# Altium PCB pix v2.4.8.PcbDoc (part 2 of 3)
Units mil, origin at the board's own origin, x right, y up, seen from the top; angles counter-clockwise.
Board outline 2756 x 1595 mil, 4 copper layers (Top, MidLayer1, MidLayer2, Bottom), stack 50.397 mil thick; 154 components, 289 nets, 731 pads, 438 vias.
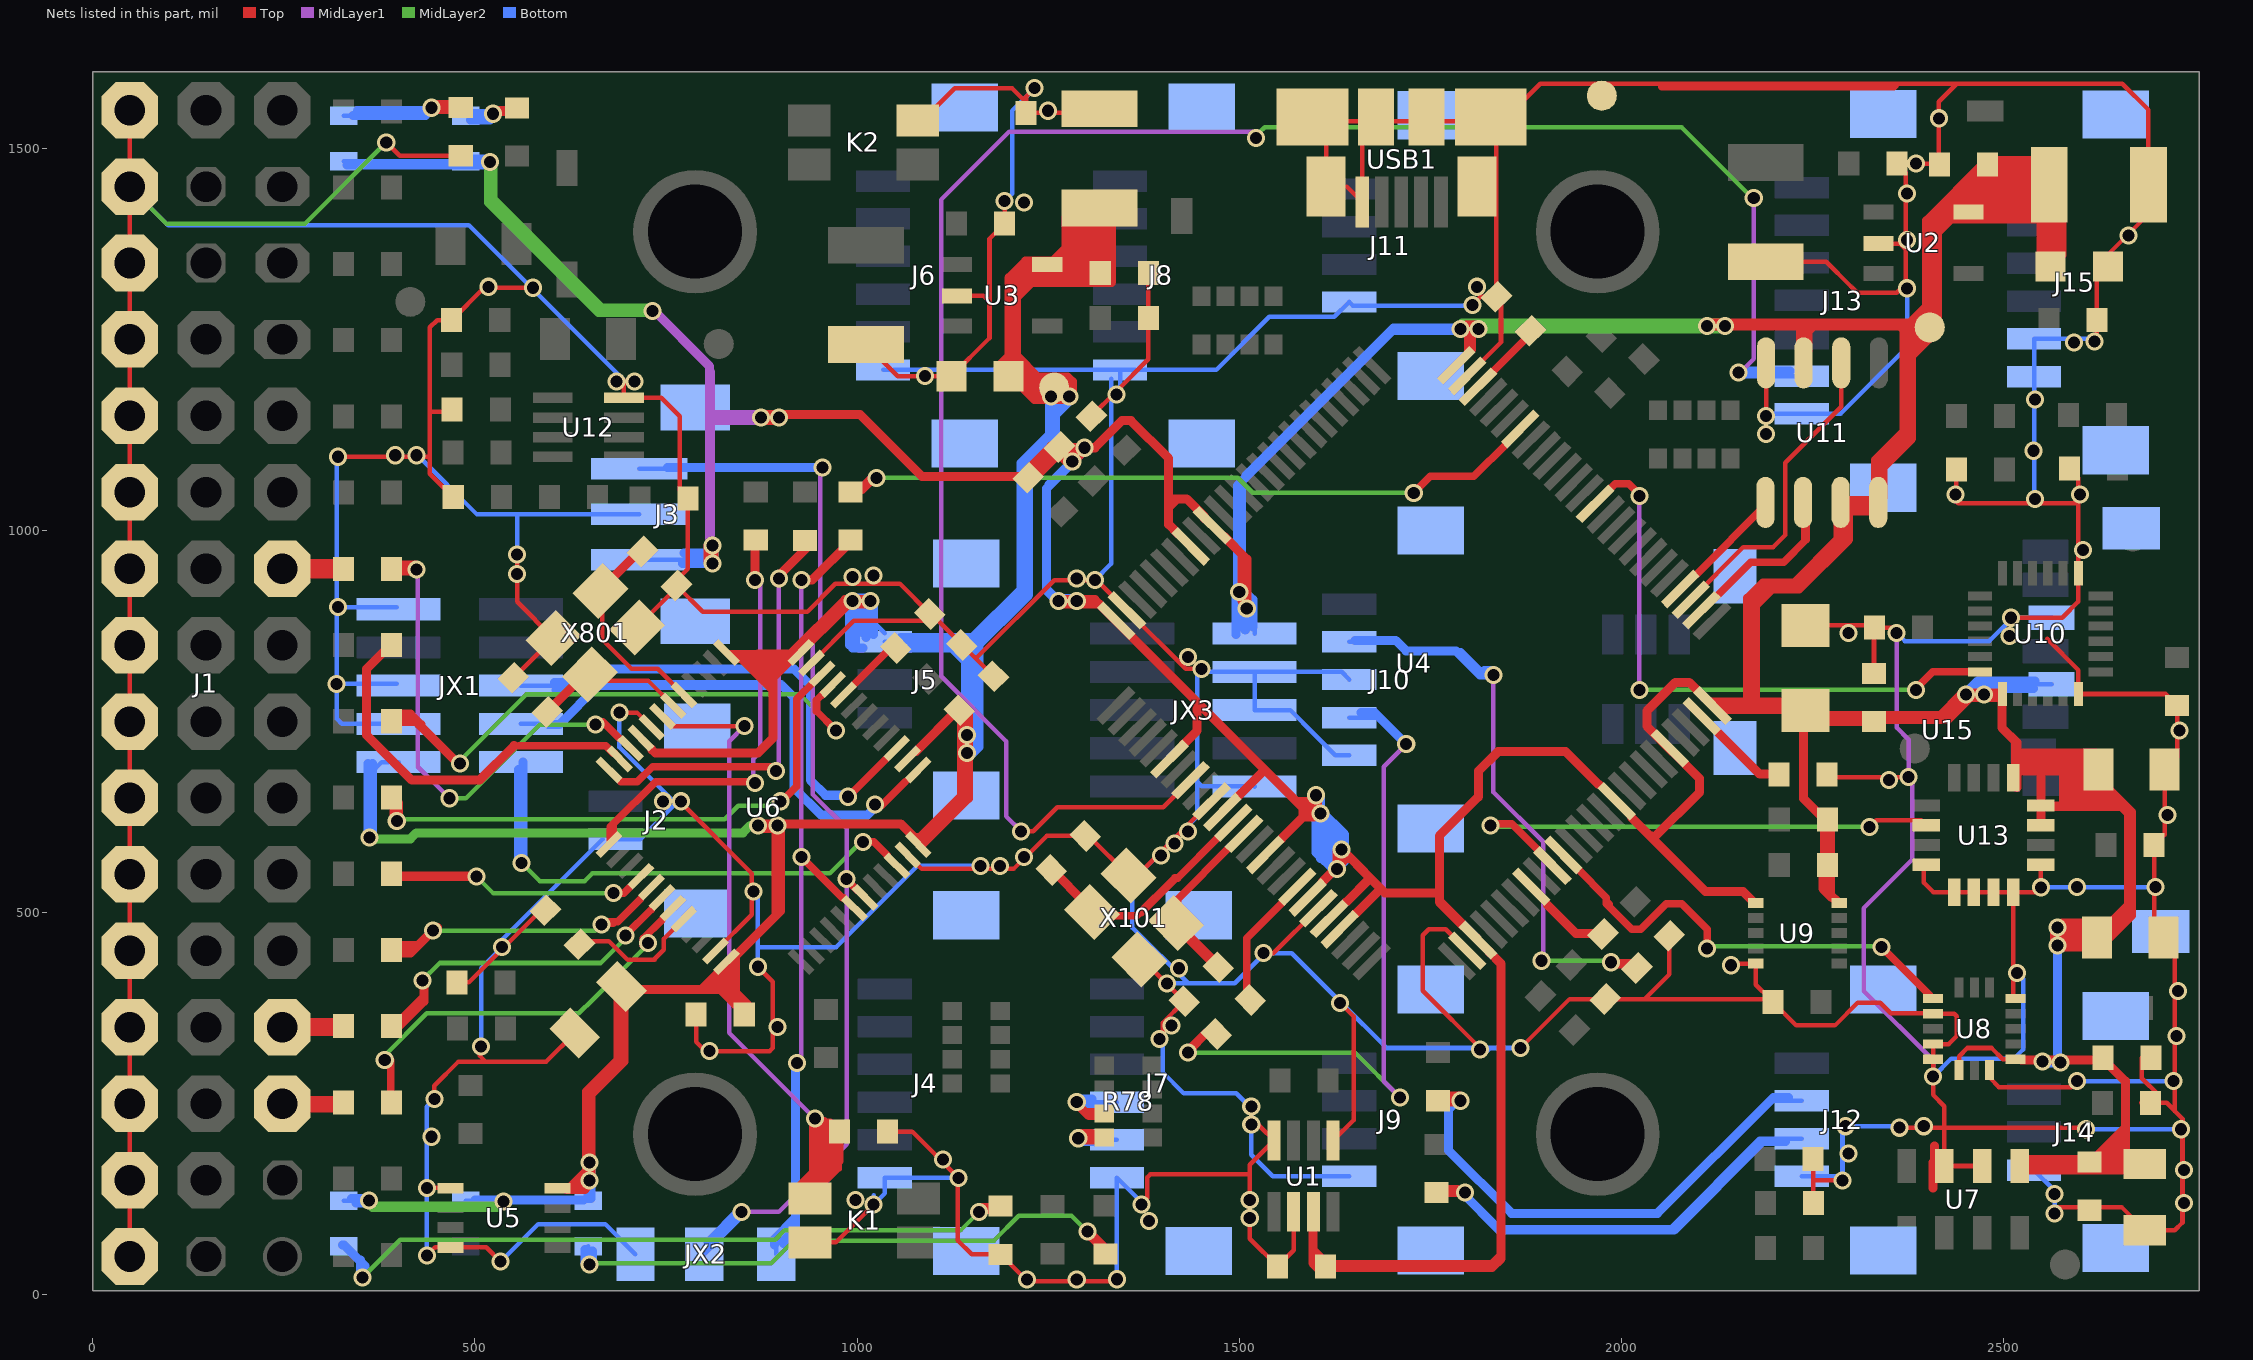
[diagram p4: the nets of this part, all layers, seen from the top]

## Via types
v1: diameter 23.62, hole 15.75, Top to Bottom, 438 vias

## Nets (pads, with @x,y where several pads share a name; then routed paths per layer and width w, separated by ;. In a path a pad name is that pad's centre, name@x,y a point inside that pad or via, vN(x,y) a via of type N, cw(c..) or ccw(c..) an arc to the next point about the centre after c; other vN are vias at no path point) (continued)
FMU-VDD_3V3: C3.2 C4.2 C18.1 C19.2 C20.1 C32.2 C33.2 C38.2 C45.1 C46.1 D1.2 J3.P$1 JX3.1 LED2.A LED4.A pad.0@2403.54,1265.75 R21.2 R22.2 R25.2 R26.2 U1.3 U2.5 U4.6 U4.11 U4.15 U4.19 U4.21 U4.22 U4.28 U4.41 U4.46 U4.50 U4.75 U4.91 U4.93 U4.100 U7.1 U8.1 U8.14 U9.1 U9.10 U10.13 U11.3 U11.7 U11.8 U13.1 U13.15 U13.16 U15.4 | length 26052.6
  Top w5.91: v1(874.02,1147.64) 875,1148.62 1002.95,1148.62 1082.7,1068.88 R25.2@1224.12,1068.88 1224.46,1068.88 R26.2@1264.88,1109.3 1297.24,1109.3 1310.09,1109.3 1344.49,1143.7 1358.27,1143.7 1407.48,1094.49 1407.48,1025.59 ; v1@1271.65,909.45 1311.42,909.45 U4.100@1339.16,881.71 1442.91,777.95 ; U4.6@1408.64,700.87 1442.91,735.14 1442.91,777.95 ; U4.93@1436.6,979.14 1407.48,1008.26 1407.48,1025.59 ; U4.11@1477.94,631.57 1531.6,685.24 1535.63,685.24 ; v1@1507.87,897.64 1507.87,960.63 1464.44,1004.07 U4.91@1464.44,1006.98 1430.08,1041.34 1423.23,1041.34 1407.48,1025.59 ; U4.15@1534.06,575.45 1580.71,622.1 ; U4.19@1589.74,519.77 1633.86,563.89 v1@1633.86,578.8 ; U1.3@1597,108.65 1597,53.16 C33.2@1613.11,37.05 1824.45,37.05 1842.52,55.12 1842.52,434.03 U4.28@1812.45,464.09 ; v1(1606.3,629.92) 1598.48,622.1 1580.71,622.1 ; U4.21@1617.58,491.93 1668.34,542.69 1668.34,544.32 ; U4.22@1631.5,478.01 1680.09,526.6 1686.06,526.6 ; v1(1633.86,582.68) v1@1633.86,578.8 ; U4.75@1784.09,1216.32 1801.18,1233.42 1801.18,1267.72 ; U4.28@1811.5,464.09 U4.28@1812.45,464.09 ; 2043.32,598.44 2102.36,657.48 2102.36,676.02 U4.46@2063.37,715.01 2035.43,742.95 2035.43,763.78 2072.83,801.18 2088.92,801.18 U4.50@2119.23,770.87 2169.29,770.87 ; v1@2122.05,1273.62 2125.98,1269.68 2257.87,1269.68 ; U9.1@2175.89,512.59 2162.89,525.59 2114.2,525.59 2079.74,560.05 U4.41@1994.07,645.72 1930.14,709.65 1837.6,709.65 1812.99,685.04 1812.99,651.57 1761.81,600.39 1761.81,519.69 ; C46.1@2238.19,761.83 2238.19,652.95 R21.2@2269.57,621.57 R22.2@2269.57,562.52 2269.57,528.05 U9.10@2285.02,512.59 ; U11.3@2238.52,1219.34 2238.52,1250.33 2257.87,1269.68 ; U8.14@2441.93,294.03 2441.93,312.01 2452.76,322.83 2484.35,322.83 2499.15,308.03 U8.1@2515.87,308.03 v1@2574.8,308.03 ; C4.2@2479.29,1478.94 2479.29,1452.56 ; U7.1@2521.09,168.43 C3.2@2607.36,168.43 ; U13.15@2548.9,614.41 U13.16@2548.9,640 2548.9,687.17 2549.21,687.48 ; U13.16@2553.07,635.83 2655.51,635.83 2665.35,625.98 2665.35,510.16 C38.2@2622.64,467.44 2581.61,467.44 v1(2570.87,456.69) ; C45.1@2559.72,1452.56 2479.29,1452.56 ; D1.2@2561.77,1345.43 C45.1@2561.77,1450.51 ; v1@2570.87,304.1 v1@2574.8,308.03 ; 2616.26,308.03 v1@2574.8,308.03 ; C19.2@2624.13,687.48 2549.21,687.48 ; C20.1@2630.08,310.04 2659.45,280.67 2659.45,220.51 C3.2@2612.44,173.5 2614.96,170.98 C18.1@2684.8,170.98 ; 1442.91,777.95 1535.63,685.24 ; 1535.63,685.24 1580.71,640.16 1580.71,622.1 ; v1@1633.86,578.8 1668.34,544.32 ; 1668.34,544.32 1686.06,526.6 ; 1686.06,526.6 1754.89,526.6 1761.81,519.69 ; 1761.81,519.69 1812.45,469.05 U4.28@1812.45,464.09 ; 2169.29,770.87 2234.66,770.87 C46.1@2240.95,764.59 2255.53,750.01 C32.2@2330.59,750.01 2429.14,750.01 2458.66,779.53 2465.17,786.04 U10.13@2498.8,786.04 2498.8,739.39 2512.9,725.29 U13.1@2512.9,676.42 2523.96,687.48 2549.21,687.48 ; 2169.29,770.87 2169.29,907.48 2187.01,925.2 2222.44,925.2 2286.94,989.7 U11.7@2286.94,1036.67 U11.8@2336.16,1036.67 2336.16,1086.16 2374.02,1124.02 2374.02,1253.94 2358.27,1269.68 ; 2257.87,1269.68 2358.27,1269.68 ; 2358.27,1269.68 2399.61,1269.68 2403.54,1273.62 2403.54,1403.54 2416.73,1416.73 U2.5@2454.37,1416.73 2479.29,1441.65 2479.29,1452.56
  Top w9.84: v1@1785.43,1261.81 v1@1814.96,1261.81 ; v1@1791.34,1261.81 v1@1818.9,1261.81 ; v1@1797.24,1269.68 v1@1811.02,1269.68 ; U4.75@1799.21,1234.25 v1@1799.21,1259.84 ; U4.75@1805.12,1236.22 1805.12,1257.87 1805.12,1242.13
  Top w11.81: v1@805.12,958.66 v1@805.12,980.32 ; v1@812.99,954.72 v1@812.99,984.25 ; v1@875.98,1143.7 901.57,1143.7 v1@899.61,1145.67 ; v1@877.95,1151.57 1003.94,1151.57 1084.65,1070.87 R25.2@1218.5,1070.87 ; R25.2@1220.47,1068.9 1220.47,1076.77 R26.2@1253.94,1110.24 ; R25.2@1232.28,1068.9 1267.72,1104.33 R26.2@1269.68,1104.33 ; R26.2@1261.81,1102.36 v1@1277.56,1086.61 ; v1@1265.75,909.45 1311.02,909.45 1584.65,635.83 1584.65,627.95 ; v1@1267.72,903.54 1316.93,903.54 U4.100@1324.8,895.67 ; R26.2@1267.72,1106.3 1283.46,1106.3 ; R26.2@1269.68,1108.27 1311.02,1108.27 1346.46,1143.7 1358.27,1143.7 1407.48,1094.49 1407.48,1007.87 U4.93@1419.29,996.06 ; v1@1281.5,1088.58 1301.18,1108.27 v1@1303.15,1108.27 ; 1409.45,1041.34 1431.1,1041.34 1454.72,1017.72 U4.91@1454.72,1015.75 ; U4.6@1427.17,720.47 1444.88,738.19 1444.88,773.62 ; U4.91@1480.32,992.13 1509.84,962.6 v1@1509.84,895.67 ; U4.11@1498.03,651.57 1531.5,685.04 1531.5,687.01 ; 1503.6,968.84 1503.6,907.82 v1@1509.84,901.57 ; U4.15@1555.12,596.46 1588.58,629.92 v1@1610.24,629.92 ; 1578.74,645.67 v1@1598.43,645.67 ; 1588.58,637.8 1590.55,637.8 ; U1.3@1596.46,88.58 1596.46,59.06 C33.2@1610.24,45.28 ; U1.3@1596.46,92.52 1596.46,41.34 C33.2@1606.3,31.5 ; v1@1596.46,629.92 v1@1596.46,653.54 ; v1@1602.36,635.83 v1@1602.36,657.48 ; U4.19@1608.27,539.37 1639.76,570.87 1643.7,570.87 ; C33.2@1612.2,35.43 1830.71,35.43 1842.52,47.24 1842.52,55.12 ; C33.2@1622.05,39.37 1830.71,39.37 1842.52,51.18 1842.52,433.07 1827.51,448.08 U4.28@1827.51,449.04 ; v1@1627.95,559.06 v1@1627.95,580.71 ; v1@1631.89,559.06 v1@1631.89,584.65 ; v1@1637.8,578.74 1690.94,525.59 1759.84,525.59 ; 1639.76,513.78 1671.26,545.28 ; U4.22@1651.57,498.03 1683.07,529.53 1687.01,529.53 ; U4.28@1793.31,482.28 1761.81,513.78 1761.81,600.39 1812.99,651.57 1812.99,685.04 1838.58,710.63 1862.2,710.63 ; 1842.52,710.63 1927.17,710.63 1970.47,667.32 ; U4.41@2013.78,624.02 2041.34,596.46 2043.31,598.43 2102.36,657.48 2102.36,675.2 2033.46,744.09 2033.46,763.78 2070.87,801.18 2088.58,801.18 U4.50@2108.27,781.5 ; 2039.37,600.39 2039.37,598.43 2110.24,527.56 2159.45,527.56 U9.1@2173.23,513.78 ; v1@2110.24,1267.72 pad.0@2395.67,1267.72 ; v1@2114.17,1271.65 2403.54,1271.65 2407.48,1267.72 pad.0@2407.48,1275.59 ; U4.50@2118.11,775.59 C46.1@2220.47,775.59 ; U4.50@2127.95,765.75 C46.1@2226.38,765.75 ; 2165.35,771.65 2165.35,911.42 2185.04,931.1 2226.38,931.1 2283.46,988.19 U11.7@2283.46,1019.68 ; 2167.32,771.65 2167.32,905.51 2188.98,927.17 2226.38,927.17 2293.31,994.09 U11.7@2293.31,1021.65 ; 2175.2,781.5 2175.2,901.57 2196.85,923.23 2232.28,923.23 2297.24,988.19 U11.7@2297.24,1027.56 ; U11.3@2234.25,1236.22 2234.25,1263.78 ; C46.1@2238.19,748.03 2238.19,649.61 2263.78,624.02 R21.2@2263.78,622.05 ; U11.3@2244.09,1236.22 2244.09,1265.75 ; C46.1@2259.84,750 C32.2@2336.61,750 ; C46.1@2259.84,755.91 2415.35,755.91 2446.85,787.4 U10.13@2494.09,787.4 ; R22.2@2263.78,559.06 2263.78,531.5 2275.59,519.68 ; R22.2@2265.75,564.96 R21.2@2265.75,620.08 ; C46.1@2269.68,757.87 2429.13,757.87 2452.76,781.5 U10.13@2496.06,781.5 ; R21.2@2273.62,622.05 2273.62,523.62 U9.10@2283.46,513.78 ; U11.7@2289.37,1025.59 U11.8@2338.58,1025.59 ; U11.7@2289.37,1033.46 U11.8@2332.68,1033.46 ; U11.7@2293.31,1039.37 U11.8@2334.65,1039.37 ; U11.8@2332.68,1035.43 2332.68,1092.52 2370.08,1129.92 2370.08,1263.78 ; U11.8@2342.52,1043.31 2342.52,1082.68 2379.92,1120.08 2379.92,1267.72 ; 2372.05,1250 2372.05,1265.75 2403.54,1297.24 ; 2375.98,1224.41 2411.42,1259.84 pad.0@2411.42,1261.81 ; 2389.76,1238.19 pad.0@2389.76,1255.91 ; pad.0@2399.61,1273.62 2399.61,1405.51 C4.2@2476.38,1482.28 ; 2401.57,1399.61 2431.1,1429.13 2450.79,1429.13 ; 2403.54,1389.76 2433.07,1419.29 ; pad.0@2409.45,1271.65 2409.45,1385.83 2431.1,1407.48 C45.1@2564.96,1407.48 ; 2411.42,1415.35 C45.1@2549.21,1415.35 ; pad.0@2413.39,1267.72 2413.39,1395.67 ; 2431.1,1425.2 C45.1@2543.31,1425.2 ; 2433.07,1433.07 2527.56,1433.07 ; 2440.94,1442.91 C45.1@2545.28,1442.91 ; 2452.76,1454.72 C45.1@2547.24,1454.72 ; 2462.6,1464.57 C45.1@2547.24,1464.57 ; C4.2@2468.5,1470.47 C45.1@2543.31,1470.47 ; C4.2@2478.35,1484.25 C45.1@2559.06,1484.25 ; 2490.16,1437.01 C45.1@2549.21,1437.01 ; C4.2@2492.13,1478.35 C45.1@2543.31,1478.35 ; U10.13@2498.03,779.53 2498.03,742.13 2517.72,722.44 U13.1@2517.72,663.39 ; U13.1@2519.68,692.91 C19.2@2606.3,692.91 ; 2519.68,702.76 C19.2@2618.11,702.76 ; 2521.65,685.04 C19.2@2612.2,685.04 ; U7.1@2523.62,177.17 C18.1@2657.48,177.17 ; U8.1@2523.62,307.09 C20.1@2629.92,307.09 ; 2523.62,708.66 C19.2@2620.08,708.66 ; U7.1@2525.59,163.39 2675.2,163.39 2677.17,165.35 C18.1@2667.32,165.35 ; U7.1@2527.56,165.35 2651.57,165.35 ; U13.15@2549.21,618.11 2549.21,685.04 ; D1.2@2549.21,1356.3 C45.1@2549.21,1413.39 ; D1.2@2551.18,1354.33 C45.1@2551.18,1415.35 ; D1.2@2551.18,1356.3 C45.1@2551.18,1411.42 ; D1.2@2555.12,1358.27 C45.1@2555.12,1405.51 ; U13.16@2557.09,639.76 2653.54,639.76 2663.39,629.92 2663.39,509.84 C38.2@2629.92,476.38 ; v1@2566.93,452.76 v1@2566.93,484.25 ; D1.2@2568.9,1342.52 C45.1@2568.9,1421.26 ; v1@2570.87,454.72 C38.2@2616.14,454.72 ; v1@2574.8,456.69 C38.2@2612.2,456.69 ; v1@2574.8,464.57 C38.2@2624.02,464.57 ; v1@2574.8,476.38 C38.2@2612.2,476.38 ; v1@2576.77,458.66 2576.77,486.22 C38.2@2614.17,486.22 ; D1.2@2576.77,1360.24 C45.1@2576.77,1421.26 ; 2578.74,647.64 2578.74,679.13 ; 2588.58,645.67 2588.58,679.13 ; 2596.46,649.61 2596.46,683.07 ; 2600.39,641.73 2600.39,679.13 ; 2610.24,641.73 C19.2@2610.24,681.1 ; C3.2@2614.17,173.23 2659.45,218.5 2659.45,279.53 2629.92,309.06 C20.1@2629.92,311.02 ; 2614.17,645.67 C19.2@2614.17,681.1 ; 2620.08,643.7 C19.2@2620.08,661.42 ; C38.2@2622.05,454.72 2625.98,454.72 2667.32,496.06 2667.32,629.92 2653.54,643.7 2653.54,645.67 ; 2625.98,641.73 2625.98,657.48 ; C19.2@2625.98,671.26 2627.95,671.26 2667.32,631.89 2667.32,627.95 ; 2631.89,647.64 2631.89,659.45 ; 2631.89,651.57 2635.83,651.57 2645.67,641.73 ; 2635.83,179.13 2635.83,190.94 ; C38.2@2635.83,470.47 2657.48,492.13 2657.48,501.97 ; 2641.73,179.13 2641.73,194.88 ; 2651.57,175.2 2651.57,206.69 ; C18.1@2659.45,177.17 2659.45,224.41
  MidLayer1 w5.91: v1(732.28,1287.4) 811.02,1208.66 811.02,1147.64 ; v1@811.02,960.63 811.02,1147.64 ; v1(874.02,1147.64) 811.02,1147.64
  MidLayer1 w11.81: v1@730.32,1291.34 v1@736.22,1291.34 ; v1@732.28,1291.34 732.28,1289.37 807.09,1214.57 v1@807.09,956.69 ; 807.09,1143.7 v1@899.61,1143.7 ; v1@811.02,954.72 v1@811.02,976.38 ; 814.96,1151.57 v1@899.61,1151.57
  MidLayer2 w5.91: v1(519.68,1482.28) 519.68,1433.07 665.35,1287.4 v1(732.28,1287.4) ; 1801.18,1267.72 2116.14,1267.72 v1@2122.05,1273.62
  MidLayer2 w11.81: v1@517.72,1482.28 517.72,1429.13 661.42,1285.43 v1@732.28,1285.43 ; v1@523.62,1484.25 523.62,1433.07 665.35,1291.34 v1@732.28,1291.34 ; v1@1787.4,1263.78 v1@2135.83,1263.78 ; v1@1791.34,1271.65 v1@2139.76,1271.65
  Bottom w5.91: LED2.A@328,1483 LED4.A@488,1483 v1@519.68,1483 ; J3.P$1@715.1,961.94 809.71,961.94 v1@811.02,960.63 ; v1@1271.65,909.45 1265.75,909.45 1248.03,927.17 1248.03,1061.02 v1@1297.24,1110.24 ; JX3.1@1520,865 1520,885.51 1505.91,899.61 1505.91,1072.83 1700.79,1267.72 1801.18,1267.72 ; v1(1606.3,629.92) 1633.86,602.36 v1(1633.86,582.68) ; v1@2458.66,779.53 2478.13,799 U15.4@2563,799 ; v1@2570.87,304.1 v1(2570.87,456.69)
  Bottom w11.81: LED2.A@332.68,1478.35 v1@521.65,1478.35 ; LED4.A@498.03,1486.22 v1@517.72,1486.22 ; J3.P$1@771.65,956.69 v1@805.12,956.69 ; J3.P$1@773.62,970.47 v1@807.09,970.47 ; v1@812.99,958.66 v1@812.99,982.28 ; v1@1261.81,905.51 v1@1281.5,905.51 ; v1@1261.81,907.48 1248.03,921.26 1248.03,1055.12 1299.21,1106.3 v1@1299.21,1108.27 ; v1@1263.98,911.21 v1@1285.23,911.21 ; JX3.1@1496.06,864.17 v1@1496.06,921.26 ; v1@1498.03,917.32 1498.03,1059.06 1700.79,1261.81 v1@1812.99,1261.81 ; v1@1500,921.26 1505.91,921.26 1517.72,909.45 JX3.1@1517.72,874.02 ; JX3.1@1505.91,875.98 v1@1505.91,919.29 ; JX3.1@1507.87,870.08 v1@1507.87,913.39 ; v1@1600.39,657.48 1600.39,578.74 v1@1625.98,553.15 ; 1606.3,570.87 1606.3,618.11 ; v1@1606.3,653.54 1606.3,633.86 1637.8,602.36 1637.8,566.93 1629.92,559.06 v1@1629.92,557.09 ; 1608.27,584.65 1608.27,576.77 1620.08,564.96 v1@1624.02,564.96 ; 1614.17,582.68 v1@1614.17,624.02 ; v1@1622.05,564.96 1622.05,612.2 ; v1@1627.95,561.02 1627.95,608.27 ; v1@2448.82,783.46 v1@2478.35,783.46 ; v1@2448.82,785.43 2466.54,803.15 U15.4@2541.34,803.15 ; v1@2460.63,791.34 v1@2470.47,791.34 ; 2462.6,793.31 U15.4@2539.37,793.31 ; v1@2551.18,303.15 v1@2574.8,303.15 ; v1@2553.15,305.12 v1@2570.87,305.12 ; v1@2570.87,307.09 v1@2570.87,484.25
  other v1: 2574.8,304.1 2551.18,305.12 2570.87,480.31 1627.95,557.09 1600.39,653.54 2450.79,785.43 2474.41,785.43 1509.84,897.64 1263.78,907.48 1287.4,907.48 1500,919.29 811.02,956.69 811.02,980.32 1281.5,1090.55 1297.24,1108.27 897.64,1147.64 1789.37,1263.78 1812.99,1263.78 2112.2,1267.72 2135.83,1267.72
FMU-VDD_5V5: 
FMU_AUX_ADC1: R13.1 U4.18 | length 316.4
  Top w5.91: R13.1@1514.58,385.75 1507.87,392.45 1507.87,465.75 U4.18@1575.82,533.69
  Top w9.84: R13.1@1509.84,395.67 1509.84,466.54 U4.18@1557.01,513.7
FMU_AUX_ADC1_PROT: J10.4 R13.2 | length 1039.4
  Top w5.91: v1(1433.07,316.93) 1457.35,341.2 R13.2@1470.04,341.2
  Top w11.81: v1@1435.04,316.93 1435.04,320.87 1456.69,342.52 R13.2@1466.54,342.52
  MidLayer1 w5.91: v1(1710.63,257.87) 1688.98,279.53 1688.98,690.94 v1(1718.5,720.47)
  MidLayer2 w5.91: v1(1433.07,316.93) 1651.57,316.93 v1(1710.63,257.87)
  Bottom w5.91: J10.4@1644,755 1683.98,755 v1(1718.5,720.47)
  Bottom w11.81: J10.4@1659.45,761.81 1677.17,761.81 v1@1716.54,722.44
FMU_AUX_ADC2: R12.1 U4.33 | length 201.9
  Top w5.91: U4.33@1882.05,533.69 1943.3,472.44 1975.59,472.44 R12.1@1975.96,472.07
  Top w11.81: 1903.54,509.84 1940.94,472.44 R12.1@1970.47,472.44
FMU_AUX_ADC2_PROT: J10.2 R12.2 | length 1019.2
  Top w5.91: v1(1986.22,435.04) 2012.99,435.04 R12.2@2020.5,427.52
  Top w11.81: v1@1988.19,433.07 R12.2@2015.75,433.07
  MidLayer1 w5.91: v1(1832.68,811.02) 1832.68,657.48 1897.64,592.52 1897.64,525.59 1897.64,438.98 v1(1895.67,437.01)
  MidLayer2 w5.91: v1(1895.67,437.01) 1984.25,437.01 v1(1986.22,435.04)
  Bottom w5.91: J10.2@1644,854.21 1706.81,854.21 1717.52,843.5 1790.35,843.5 1822.83,811.02 v1(1832.68,811.02) ; v1(1895.67,437.01) v1@1899.61,437.01
  Bottom w11.81: J10.2@1651.57,856.3 1704.72,856.3 1718.5,842.52 1783.46,842.52 1812.99,812.99 ; 1785.43,840.55 1814.96,811.02 v1(1832.68,811.02) ; 1820.87,816.93 v1@1832.68,816.93
FRAM_MISO: U4.53 U11.2 | length 414.3
  Top w5.91: U4.53@2090.87,909.54 2159.67,978.35 2198.82,978.35 2214.57,994.09 2214.57,1088.58 2287.73,1161.75 U11.2@2287.73,1219.34
FRAM_MOSI: U4.54 U11.5 | length 291.4
  Top w5.91: U4.54@2076.95,923.46 2188.52,1035.03 U11.5@2188.52,1036.67
  Top w9.84: U4.54@2098.43,942.91 2188.98,1033.46 U11.5@2188.98,1037.4
FRAM_SCK: U4.52 U11.6 | length 411.6
  Top w5.91: U4.52@2104.79,895.62 2167.82,958.66 2210.63,958.66 2237.73,985.76 U11.6@2237.73,1036.67
  Top w9.84: U4.52@2124.02,913.39 2169.29,958.66 2212.6,958.66 2242.13,988.19 U11.6@2242.13,1029.53
GND: C1.1 C2.1 C3.1 C4.1 C5.2 C7.2 C9.2 C10.2 C11.1 C15.2 C16.1 C18.2 C19.1 C20.2 C21.1 C22.1 C23.1 C27.2 C30.2 C31.1 C32.1 C33.1 C34.1 C35.1 C36.1 C37.2 C38.1 C39.2 C40.2 C41.2 C42.1 C43.2 C44.2 C45.2 C46.2 C47.1 D1.1 D4.1 J1.3 J1.6 J1.9 J1.12 J1.15 J1.18 J1.21 J1.24 J1.27 J1.30 J1.33 J1.36 J1.39 J1.42 J1.45 J1.48 J2.2 J2.M$0 J2.M$1 J3.P$2 J3.P$4 J3.P$5 J4.6 J4.M$0 J4.M$1 J5.M$0 J5.M$1 J6.6 J6.M$0 J6.M$1 J7.6 J7.M$0 J7.M$1 J8.6 J8.M$0 J8.M$1 J9.4 J9.M$0 J9.M$1 J10.3 J10.5 J10.M$0 J10.M$1 J11.4 J11.M$0 J11.M$1 J12.4 J12.M$0 J12.M$1 J13.7 J13.M$0 J13.M$1 J14.3 J14.M$0 J14.M$1 J15.5 J15.6 J15.M$0 J15.M$1 JX1.3 JX1.5 JX1.9 JX2.3 JX3.3 JX3.5 JX3.9 K1.7 K2.7 pad.0@1974.41,1568.9 R1.2 R8.2 R15.1 R23.1 R24.1 R28.2 R31.2 R32.2 R37.1 R42.2 R53.2 R54.2 R57.2 R60.2 R61.1 U1.2 U1.5 U1.8 U2.2 U3.2 U4.10 U4.20 U4.27 U4.74 U4.99 U5.1 U5.4 U6.8 U6.23 U6.35 U6.47 U7.2 U7.3 U8.5 U8.10 U8.12 U8.13 U8.16 U9.5 U10.1 U10.18 U11.4 U12.4 U13.8 U13.9 U13.10 U13.11 U13.12 U13.13 U15.6 U15.NC U15.NC1 U15.NC2 U15.NC3 USB1. USB1.GND X101.2 X101.4 X801.2 X801.4 | length 24796.2
  Top w5.91: J1.3@48,50 J1.6@48,150 J1.9@48,250 J1.12@48,350 J1.15@48,450 J1.18@48,550 J1.21@48,650 J1.24@48,750 J1.27@48,850 J1.30@48,950 J1.33@48,1050 J1.36@48,1150 J1.39@48,1250 J1.42@48,1350 J1.45@48,1450 J1.48@48,1550 ; v1(320.87,1096.46) 438.97,1096.46 440.94,1094.49 ; v1(383.86,1507.87) 401.42,1490.31 R8.2@481.38,1490.31 ; v1(437.01,51.18) 447.73,61.91 U5.4@467.87,61.91 514.87,61.91 v1(533.46,43.31) ; v1(437.01,139.76) 467.4,139.76 U5.1@467.87,139.29 ; v1(446.85,255.91) 446.85,273.62 478.35,305.12 513.78,305.12 ; C31.1@470.12,1158.54 467.09,1155.51 440.94,1155.51 ; R61.1@471.54,1043.66 440.94,1074.25 440.94,1094.49 ; R42.2@476.35,408.75 492.09,408.75 586.4,503.05 R37.1@592.12,503.05 ; v1(507.87,324.8) 505.91,322.84 505.91,312.99 513.78,305.12 ; C42.1@549.87,807.12 550.53,807.12 X801.4@602.55,859.14 555.12,906.57 v1@555.12,960.63 ; v1(576.06,1317.64) 511.81,1317.64 R60.2@469.41,1275.24 450.43,1275.24 440.94,1265.75 440.94,1155.51 ; C47.1@630.47,342.26 593.33,305.12 513.78,305.12 ; v1(688.98,761.81) 711.99,761.81 U6.8@731.19,742.61 ; v1@694.95,1196.78 U12.4@694.95,1173.71 743.61,1173.71 767.72,1149.61 767.72,1052.6 C36.1@778.62,1041.69 778.62,949.88 763.7,934.96 C41.2@763.7,927.93 ; X801.2@711.99,873.17 763.7,924.88 C41.2@763.7,927.93 ; v1@769.68,643.7 862.2,551.18 v1@862.2,527.56 ; C22.1@789.29,366.53 789.29,330.78 801.18,318.9 v1(807.09,318.9) 885.83,318.9 889.76,322.83 889.76,409.45 v1(870.08,429.13) ; U6.23@814.75,449.75 862.2,497.2 v1@862.2,527.56 ; v1@870.08,527.56 v1@862.2,527.56 ; K1.7@938.4,68.38 971.92,68.38 v1(1021.65,118.11) ; U6.47@940.32,826.46 995.75,881.89 1086.26,881.89 R53.2@1095.2,890.83 1095.2,891.02 1056.1,930.12 971.45,930.12 935.04,893.7 797.94,893.7 C41.2@763.7,927.93 ; C43.2@1011.61,1243.39 1053.15,1201.85 v1(1088.58,1201.85) D4.1@1123.27,1201.85 1173.23,1251.81 1173.23,1299.21 ; C23.1@1039.96,213.5 1071.93,213.5 v1@1131.89,153.54 ; U6.35@1066.18,575.32 1084.41,557.09 1204.72,557.09 1247.96,600.32 C39.2@1298.45,600.32 1303.23,600.32 X101.2@1355.25,548.3 1366.38,548.3 U4.10@1463.8,645.72 ; K2.7@1079.24,1536.62 1085.83,1536.62 1127.95,1578.74 1202.76,1578.74 1220.98,1560.51 C21.1@1220.98,1546.42 ; R53.2@1096.83,890.83 C27.2@1178.36,809.31 ; U3.2@1130.63,1306.89 1165.55,1306.89 1173.23,1299.21 ; v1@1131.89,153 1131.89,70.87 1149.88,52.87 R1.2@1187.72,52.87 1222.87,17.72 v1@1337.48,17.72 ; 1157.48,834.65 1257.87,935.04 v1(1311.02,935.04) 1313.67,935.04 U4.99@1353.08,895.62 1429.81,818.9 v1@1444.88,818.9 ; v1(1193.03,1430.98) C9.2@1193.03,1401.57 1173.23,1381.77 1173.23,1299.21 ; v1(1232.28,1578.74) 1220.98,1567.44 C21.1@1220.98,1546.42 ; R23.1@1306.56,1149.49 v1@1339.36,1182.29 ; C15.2@1317.13,1551.89 1311.65,1546.42 C21.1@1220.98,1546.42 ; v1(1339.36,1177.94) v1@1339.36,1182.29 ; X101.4@1369.28,438.86 1373.01,438.86 C40.2@1427.93,383.93 1399.61,355.61 v1@1399.61,344.49 ; v1(1372.05,118.11) 1379.92,125.98 1379.92,153.54 1383.86,157.48 1513.78,157.48 ; C10.2@1381.1,1337.17 C7.2@1381.1,1277.83 1381.1,1224.03 v1@1339.36,1182.29 ; v1(1515.75,222.44) 1525.08,222.44 1528.29,219.23 U1.8@1545.61,201.91 1513.78,170.07 1513.78,157.48 ; v1(1531.5,446.85) 1544.66,446.85 U4.20@1603.66,505.85 ; U1.2@1571.2,108.65 1571.2,58.13 C33.1@1550.12,37.05 1513.78,73.39 1513.78,118.11 1513.78,157.48 ; USB1.@1595.86,1541 1601.43,1535.43 1823.43,1535.43 USB1.@1829,1541 1850.06,1541 1893.7,1584.65 2438.98,1584.65 ; USB1.@1613.57,1450 USB1.@1613.57,1523.28 ; U1.5@1623,201.91 1649.61,228.51 1649.61,364.17 v1(1631.89,381.89) ; 1640.82,1450 USB1.GND@1660.82,1430 USB1.@1660.82,1522.79 ; U4.74@1798.23,1202.18 1842.52,1246.47 C2.1@1842.52,1300.06 ; U4.27@1798.53,450.18 1770.36,478.35 1748.03,478.35 1740.16,470.47 1740.16,397.64 1818.9,318.9 v1@1818.9,312.99 ; v1@1807.09,1297.24 1815.8,1305.96 C2.1@1836.62,1305.96 USB1.@1836.62,1533.38 ; v1(1868.11,322.83) 1932.16,386.89 R32.2@1979.04,386.89 2030.59,386.89 ; R24.1@2062.78,469.7 2062.78,419.08 2030.59,386.89 ; v1@2145.82,433.22 U9.5@2175.89,433.22 2175.89,405.53 R57.2@2194.53,386.89 ; C44.2@2188.78,1351.65 2268.13,1351.65 2299.9,1319.88 2302.02,1317.77 2308.76,1311.02 2360.24,1311.02 2372.05,1322.83 2372.05,1368.11 ; v1(2188.98,1149.61) 2189.31,1149.94 U11.4@2189.31,1219.34 ; C46.2@2240.94,875.71 C37.2@2328.54,875.71 ; C11.1@2250.9,120.24 2250.9,149.61 ; R15.1@2250.9,177.73 2250.9,149.61 ; C16.1@2269.19,680.53 2272.55,677.17 v1(2375.98,677.17) ; v1(2289.37,149.61) 2250.9,149.61 ; C32.1@2330.59,813 C37.2@2330.59,872.25 ; C37.2@2331.3,872.95 2353.43,872.95 v1(2360.24,866.14) ; U2.2@2336.26,1375.39 2364.76,1375.39 2372.05,1368.11 ; C1.1@2360.55,1479.92 v1(2385.82,1479.92) 2415.32,1479.92 C4.1@2415.35,1479.88 ; v1(2364.17,218.5) 2422.48,218.5 ; C1.1@2372.05,1468.43 2372.05,1368.11 ; U13.8@2395.67,559.19 2395.67,539.37 2408.43,526.61 U13.9@2435.51,526.61 U13.10@2461.1,526.61 U13.11@2486.9,526.61 U13.12@2512.9,526.61 ; C4.1@2416.3,1478.94 C4.1@2415.35,1479.88 ; R28.2@2438.46,1080 2438.46,1037.91 2440.94,1035.43 2598.01,1035.43 ; U7.2@2472.09,168.43 U7.3@2422.48,168.43 2422.48,218.5 ; U8.16@2481.61,294.03 2481.61,284.13 2494.09,271.65 2588.58,271.65 v1(2596.46,279.53) ; v1@2511.81,885.83 2576.77,885.83 2598.01,907.06 U10.1@2598.01,943.78 2598.01,1035.43 ; U8.5@2512.9,390.37 v1@2512.9,421.26 ; v1(2517.72,421.26) v1@2512.9,421.26 ; U13.13@2548.9,562.61 v1(2548.9,533.15) 2542.36,526.61 U13.12@2512.9,526.61 ; 2557.09,858.27 2598.01,817.35 U10.18@2598.01,786.04 2712.31,786.04 C35.1@2727.28,771.06 2727.28,704.02 C19.1@2710.75,687.48 ; v1@2566.93,114.17 2655,114.17 C18.2@2684.8,84.37 2724.13,84.37 2734.25,94.49 2734.25,230.31 2724.41,240.16 ; R31.2@2586.34,1080.95 2598.01,1069.28 2598.01,1035.43 ; v1@2606.3,218.5 2422.48,218.5 ; v1(2619.08,1247.06) 2622.32,1250.31 C5.2@2622.32,1275.35 2622.32,1346.73 C45.2@2689.68,1414.09 ; C30.2@2680.51,251.06 C30.2@2692.32,251.06 2713.5,251.06 2724.41,240.16 ; C20.2@2681.26,310.04 2681.1,309.88 2681.1,283.46 C30.2@2702.91,261.65 ; C45.2@2689.68,1452.56 2689.68,1550.47 2655.51,1584.65 2438.98,1584.65 ; C38.1@2703.66,473.03 C38.1@2709.25,467.44 ; C19.1@2710.75,708.78 C19.1@2710.75,687.48 ; C19.1@2724.41,701.14 C19.1@2710.75,687.48 ; 440.94,1094.49 440.94,1155.51 ; 2030.59,386.89 R57.2@2194.53,386.89 ; R57.2@2194.53,386.89 R57.2@2198.46,382.95 2229.06,352.36 2279.53,352.36 2309.06,381.89 2338.58,381.89 2352.36,368.11 2407.54,368.11 U8.10@2407.93,367.72 2435.43,367.72 2438.98,364.17 2438.98,338.58 2428.43,328.03 U8.12@2407.93,328.03 U8.13@2407.93,308.03 v1(2407.93,285.43) 2407.93,261.36 2422.48,246.81 2422.48,218.5 ; C4.1@2415.35,1479.88 2415.35,1561.02 2438.98,1584.65 ; v1@2512.9,421.26 U13.12@2512.9,526.61 ; C38.1@2709.25,467.44 2724.41,452.28 2724.41,240.16 ; C38.1@2709.25,467.44 2697.17,479.53 C34.1@2697.17,588.31 2710.75,601.89 C19.1@2710.75,687.48
  Top w9.84: 2053.15,1580.71 2356.3,1580.71 ; 2074.8,1582.68 2358.27,1582.68
  Top w11.81: 2407.48,139.76 2407.48,173.23 ; 2409.45,171.26 2409.45,194.88
  MidLayer1 w5.91: v1(2360.24,866.14) 2360.24,742.13 2375.98,726.38 v1(2375.98,677.17) 2380.91,672.24 2380.91,569.88 2316.93,505.91 2316.93,397.64 2407.93,306.64 v1(2407.93,285.43)
  MidLayer2 w5.91: J1.45@48,1450 96.43,1401.57 277.56,1401.57 v1(383.86,1507.87) ; v1@1132.43,152.12 v1(1132.43,153) ; v1(1232.28,1578.74) v1@1234.25,1576.77 ; v1(2509.84,885.83) v1@2511.81,885.83
  Bottom w5.91: J1.45@48,1450 98.39,1399.61 492.13,1399.61 v1@694.95,1196.78 ; v1(320.87,1096.46) 318.9,1098.43 v1@318.9,889.76 ; JX1.9@397.39,899.61 328.74,899.61 v1@318.9,889.76 ; JX1.5@397.79,799.21 v1(318.9,799.21) ; JX1.3@400,747 325.83,747 318.9,753.94 v1(318.9,799.21) ; v1(423.23,1098.43) 425.2,1098.43 502.62,1021 557.09,1021 ; v1@435.04,141.73 v1(437.01,139.76) ; v1(437.01,51.18) 437.01,118.11 v1(437.01,139.76) ; v1(446.85,255.91) 437.01,246.06 v1(437.01,139.76) ; v1(507.87,324.8) 507.87,427.16 v1(535.43,454.72) 535.43,464.57 J2.2@666.87,596 ; v1(533.46,43.31) 582.68,92.52 670.32,92.52 JX2.3@709.84,53 ; v1@555.12,960.63 555.12,1019.03 557.09,1021 ; J2.2@684,596 716.08,596 762.8,642.72 688.98,716.54 v1(688.98,761.81) ; J3.P$2@715.1,1021 557.09,1021 ; v1(870.08,429.13) 870.08,454.72 ; v1@870.08,527.56 870.08,454.72 ; 1021.65,129.92 v1(1021.65,118.11) 1036,132.46 J4.6@1036,153 v1(1132.43,153) ; J6.6@1034,1210 v1@1080.43,1210 ; v1(1088.58,1201.85) v1@1080.43,1210 ; v1(1161.42,561.02) 1078.74,561.02 972.44,454.72 870.08,454.72 ; v1(1193.03,1430.98) 1202.76,1440.71 1202.76,1549.21 v1(1232.28,1578.74) ; v1(1311.02,935.04) 1332.68,956.7 J8.6@1332.68,1198.68 ; v1(1339.36,1177.94) 1344,1182.58 J8.6@1344,1210 ; v1(1340,20.24) J7.6@1340,153 1372.05,120.95 v1(1372.05,118.11) ; v1@1399.61,344.49 1399.61,291.34 1427.17,263.78 1496.06,263.78 1515.75,244.09 v1(1515.75,222.44) 1515.75,183.07 1543.82,155 J9.4@1644,155 ; v1(1405.51,407.48) 1433.07,407.48 ; JX3.9@1520,665 1519.65,665.35 1450.79,665.35 1444.88,671.26 ; 1599.64,732.14 JX3.5@1566.78,765 ; v1(1631.89,381.89) v1@1632.87,382.87 ; J10.5@1644,706 1625.78,706 JX3.5@1566.78,765 ; J10.3@1644,805 1634,815 JX3.3@1520,815 ; v1@1807.09,1297.24 1810.04,1294.29 1648.71,1294.29 J11.4@1644,1299 1624.53,1279.53 1539.37,1279.53 1469.84,1210 J8.6@1344,1210 ; v1@1818.9,312.99 1828.74,322.83 ; v1(1868.11,322.83) 1828.74,322.83 ; v1(2188.98,1149.61) 2192.37,1153 J13.7@2236,1153 2286.86,1153 2374.02,1240.16 v1(2374.02,1316.93) ; J12.4@2236,155 v1@2283.98,155 ; v1(2289.37,149.61) v1@2289.37,216.54 ; v1(2293.31,220.47) 2362.2,220.47 v1(2364.17,218.5) ; v1(2360.24,866.14) 2371.06,855.32 2481.3,855.32 2511.98,886 U15.6@2563,886 ; v1(2407.93,285.43) 2431.55,309.06 2513.78,309.06 2525.59,320.87 2525.59,413.38 v1(2517.72,421.26) ; J14.3@2540,163 2566.93,136.07 v1@2566.93,114.17 ; v1@2540,1041.97 J15.6@2540,1201 J15.5@2540,1251 2619.08,1251 v1(2619.08,1247.06) ; v1(2548.9,533.15) 2549.21,533.46 v1(2698.82,533.46) ; v1(2596.46,279.53) v1(2722.44,279.53) ; v1(2608.27,216.54) v1(2732.28,216.54) ; v1(318.9,799.21) v1@318.9,889.76 ; v1@1080.43,1210 J8.6@1344,1210 ; 1433.07,407.48 1494.09,407.48 1531.5,444.88 v1(1531.5,446.85) 1568.9,446.85 v1@1632.87,382.87 ; 1433.07,407.48 1360.24,480.31 1360.24,541.34 1393.7,574.8 1444.88,625.98 1444.88,671.26 ; 1444.88,671.26 1444.88,818.9 1448.78,815 JX3.3@1520,815 ; JX3.3@1520,815 JX3.5@1520,765 JX3.5@1566.78,765 ; v1@1632.87,382.87 1692.91,322.83 1828.74,322.83
  other v1: 1222.44,19.68 1287.4,19.68 1381.89,96.46 1513.78,100.39 2566.93,106.3 2736.22,120.08 998.03,124.02 1513.78,124.02 2566.93,131.89 2736.22,163.39 1112.2,177.17 2297.24,185.04 442.91,206.69 2395.67,220.47 1515.75,246.06 1814.96,320.87 1395.67,334.65 2726.38,338.58 895.67,350.39 1411.42,352.36 2728.35,397.64 1421.26,427.17 2143.7,431.1 864.17,527.56 2596.46,533.46 1187.01,561.02 1218.5,572.83 1397.64,574.8 1415.35,590.55 1433.07,606.3 2714.57,627.95 746.06,645.67 769.68,645.67 2350.39,673.23 2730.32,738.19 1450.79,818.9 1433.07,834.65 2507.87,862.2 2297.24,866.14 320.87,899.61 1287.4,937.01 994.09,938.98 1021.65,940.94 555.12,942.91 555.12,968.5 2604.33,974.41 2541.34,1041.34 2437.01,1047.24 2600.39,1047.24 395.67,1098.43 2539.37,1104.33 2188.98,1125.98 2541.34,1171.26 685.11,1194.81 708.66,1194.88 2592.52,1246.06 1805.12,1295.28 517.72,1318.9 1811.02,1318.9 2374.02,1379.92 2663.39,1385.83 1218.5,1429.13 2374.02,1440.94 2415.35,1539.37 1250,1549.21
GPIO_EXT_1: J13.6 U4.8 | length 2641
  Top w5.91: v1(1214.57,606.3) 1230.32,606.3 1261.81,637.8 1400.72,637.8 U4.8@1436.22,673.29
  MidLayer1 w5.91: v1(1214.57,606.3) 1194.88,625.98 1194.88,724.41 1110.24,809.06 1110.24,1433.07 1198.82,1521.65 v1@1517.72,1521.65 ; v1@2155.51,1206.69 2173.23,1224.41 v1(2173.23,1435.04)
  MidLayer2 w5.91: v1@1517.72,1521.65 1527.26,1521.65 1533.17,1527.56 2078.74,1527.56 v1@2171.26,1435.04
  Bottom w5.91: v1(2153.54,1206.69) 2158.24,1202 J13.6@2236,1202
  Bottom w11.81: v1@2157.48,1208.66 J13.6@2220.47,1208.66
  other v1: 1521.65,1513.78
GYRO_DRDY: U4.35 U13.6 | length 750.3
  Top w5.91: v1(1828.74,614.17) 1857.24,614.17 U4.35@1909.89,561.53 ; v1(2324.8,612.2) 2333.66,621.06 2392.44,621.06 U13.6@2399.09,614.41
  Top w9.84: v1@1836.61,616.14 1856.3,616.14 U4.35@1891.73,580.71
  MidLayer2 w5.91: v1(1828.74,614.17) 1830.71,612.2 v1(2324.8,612.2)
IO-!RESET: C23.2 K1.3 U6.7 | length 1297.1
  Top w5.91: U6.7@745.33,756.75 757.99,744.09 v1(852.36,744.09) ; K1.3@938.4,125.92 976.97,164.49 C23.2@976.97,213.5 957.76,213.5 944.88,226.38 v1(944.88,230.31)
  Top w11.81: K1.3@921.26,137.8 946.85,163.39 946.85,181.1 ; K1.3@942.91,145.67 v1@942.91,232.28 ; K1.3@950.79,137.8 v1@950.79,230.32 ; v1@954.72,224.41 C23.2@964.57,224.41 ; K1.3@956.69,135.83 956.69,155.51 976.38,175.2 C23.2@976.38,212.6 ; K1.3@956.69,137.8 956.69,226.38 ; 956.69,210.63 960.63,210.63 ; 956.69,220.47 C23.2@968.5,220.47 ; 964.57,171.26 C23.2@964.57,210.63
  MidLayer1 w5.91: v1(852.36,744.09) 832.68,724.41 832.68,342.52 v1(944.88,230.31)
IO-!VDD_SERVO_IN_FAULT: 
IO-BOOT0: R53.1 U6.44 | length 166.2
  Top w5.91: U6.44@982.08,784.7 1043.67,846.29 R53.1@1050.66,846.29
  Top w9.84: U6.44@994.67,797.29 1041.87,844.49 R53.1@1047.24,844.49
IO-BOOT1: R37.2 U6.20 | length 179.4
  Top w5.91: R37.2@636.67,458.51 636.82,458.66 640.75,462.6 675.26,462.6 699.87,437.99 734.94,437.99 735.23,438.29 735.23,439.66 747.05,451.48 747.05,465.48 U6.20@773.03,491.47
IO-CH1: R49.1 U6.10 | length 735.1
  Top w5.91: R49.1@390.83,949.87 v1@422.18,949.87 ; v1(657.48,746.06) 672.58,746.06 U6.10@703.62,715.03
  Top w9.84: v1@655.51,750 667.32,750 U6.10@688.98,728.35
  Top w11.81: 405.51,954.72 v1@421.26,954.72 ; v1@413.39,946.85 395.67,946.85 v1@419.29,946.85
  MidLayer1 w5.91: v1@425.2,946.85 425.2,690.94 v1(466.54,649.61)
  MidLayer2 w5.91: v1(466.54,649.61) 488.19,649.61 584.65,746.06 v1(657.48,746.06)
  other v1: 423.23,948.82
IO-CH1-PROT: J1.28 R49.2 | length 178.3
  Top w5.91: J1.28@248,950 248.13,949.87 R49.2@327.83,949.87
  Top w11.81: J1.28@267.72,956.69 R49.2@318.9,956.69 ; J1.28@269.68,942.91 R49.2@316.93,942.91
IO-CH2: R48.1 U6.11 | length 1011.2
  Top w5.91: R48.1@390.83,850.11 358.27,817.55 358.27,734.25 418.31,674.21 508.86,674.21 553.15,718.5 671.86,718.5 U6.11@689.47,700.89
  Top w9.84: 557.09,718.5 671.26,718.5 681.1,708.66 U6.11@683.07,708.66
  Top w11.81: R48.1@391.73,852.36 358.27,818.9 358.27,732.28 417.32,673.23 505.91,673.23 551.18,718.5
IO-CH3: R35.1 U6.45 | length 953.2
  Top w5.91: R35.1@390.83,750.36 424.84,750.36 v1(480.32,694.88) ; U6.45@968.16,798.62 946.85,777.31 946.85,763.78 v1(972.44,738.19)
  Top w9.84: U6.45@956.69,787.4 946.85,777.56 946.85,763.78 970.47,740.16 v1@970.47,738.19
  Top w11.81: R35.1@395.67,750 423.23,750 v1@476.38,696.85 ; R35.1@395.67,759.84 415.35,759.84 429.13,746.06
  MidLayer1 w5.91: v1@478.35,692.91 v1(480.32,694.88)
  MidLayer2 w5.91: v1(480.32,694.88) 478.35,696.85 566.93,785.43 925.2,785.43 v1(972.44,738.19)
IO-CH4: R36.1 U6.46 | length 936.1
  Top w5.91: R36.1@390.83,650.61 390.83,622.95 v1@399.61,614.17 ; v1(899.61,645.67) 921.26,667.32 921.26,779.56 U6.46@954.24,812.54
  Top w9.84: v1@903.54,643.7 903.54,647.64 921.26,665.35 921.26,779.53 U6.46@942.91,801.18
  Top w11.81: v1@399.61,624.02 R36.1@399.61,643.7
  MidLayer2 w5.91: v1@399.61,614.17 407.48,622.05 826.77,622.05 844.49,639.76 883.86,639.76 889.76,645.67 v1(899.61,645.67)
  other v1: 397.64,620.08
IO-CH5: R39.1 U6.16 | length 465.9
  Top w5.91: R39.1@390.83,550.85 v1@498.36,550.85 ; v1@683.07,525.59 695.13,525.59 U6.16@717.02,547.48
  Top w9.84: v1@677.17,525.59 694.88,525.59 U6.16@702.76,533.46
  Top w11.81: R39.1@397.64,547.24 v1@496.06,547.24
  MidLayer2 w5.91: v1(501.97,547.24) 523.62,525.59 v1(681.1,525.59)
IO-CH6: R40.1 U6.17 | length 553.4
  Top w5.91: R40.1@390.83,451.1 419.6,451.1 v1(444.88,476.38) ; v1(665.35,484.25) 681.63,484.25 688.26,490.88 ; 685.57,488.19 688.26,490.88 ; U6.17@730.94,533.56 688.26,490.88
  Top w9.84: v1@663.39,488.19 687.01,488.19 716.54,517.72
  Top w11.81: R40.1@391.73,456.69 425.2,456.69 ; R40.1@393.7,446.85 415.35,446.85 448.82,480.32 v1@450.79,480.32
  MidLayer2 w5.91: v1(444.88,476.38) 649.61,476.38 657.48,476.38 v1(665.35,484.25)
  Bottom w5.91: v1@661.42,480.32 v1(665.35,484.25)
IO-CH7: R41.1 U6.18 | length 591
  Top w5.91: R41.1@390.83,351.35 431.1,391.62 v1(431.1,411.42) ; v1(696.85,470.24) 699.05,472.44 702.75,472.44 700.79,474.41 699.63,474.41 U6.18@744.86,519.64
  Top w9.84: v1@694.88,470.47 696.85,470.47 730.32,503.94 ; v1@696.85,472.44 v1@698.82,472.44
  Top w11.81: R41.1@397.64,348.43 433.07,383.86 v1@433.07,411.42
  MidLayer2 w5.91: v1(431.1,411.42) 453.74,434.06 664.37,434.06 702.75,472.44 699.05,472.44 v1(696.85,470.24)
  Bottom w5.91: v1(696.85,470.24) 700.56,470.24 v1@702.76,472.44
IO-CH8: R38.1 U6.19 | length 621.6
  Top w5.91: v1(381.89,307.09) 390.83,298.15 R38.1@390.83,251.59 ; v1(726.38,460.04) 726.38,458.66 726.38,473.1 U6.19@758.89,505.61
  Top w9.84: R38.1@389.76,261.81 v1@389.76,307.09 ; v1@720.47,456.69 720.47,466.54 744.09,490.16
  MidLayer2 w5.91: v1(381.89,307.09) 381.89,312.99 437.01,368.11 635.83,368.11 654.53,386.81 726.38,458.66 v1(726.38,460.04)
IO-CH8-PROT: J1.7 R38.2 | length 176.7
  Top w5.91: J1.7@249.59,251.59 R38.2@327.83,251.59
  Top w11.81: J1.7@267.72,253.94 312.99,253.94 ; J1.7@273.62,244.09 R38.2@326.77,244.09
IO-SWCLK: JX1.4 U6.37 | length 1352.3
  Top w5.91: v1(1023.62,641.73) 1035.02,641.73 U6.37@1080.03,686.74
  Top w9.84: v1@1023.62,639.76 1031.5,639.76 1062.99,671.26
  Bottom w5.91: JX1.4@560,747 611.17,747 665.35,801.18 901.57,801.18 920.28,782.48 920.28,664.37 953.74,630.91 1012.8,630.91 v1(1023.62,641.73)
  Bottom w11.81: JX1.4@596.46,746.06 610.24,746.06 661.42,797.24 901.57,797.24 917.32,781.5 917.32,663.39 952.76,627.95 1013.78,627.95 v1@1025.59,639.76
IO-SWDIO: JX1.2 U6.34 | length 963.5
  Top w5.91: v1@1007.87,590.55 1023.11,590.55 U6.34@1052.26,561.4
  Top w9.84: v1@1001.97,592.52 1021.65,592.52 U6.34@1039.37,574.8
  MidLayer1 w5.91: v1(1007.87,592.52) v1@1009.84,592.52
  MidLayer2 w5.91: v1(561.02,564.96) 584.65,541.34 643.7,541.34 653.54,551.18 964.25,551.18 1005.59,592.52 v1(1007.87,592.52)
  Bottom w5.91: JX1.2@560,697 560,565.98 v1(561.02,564.96)
  Bottom w11.81: v1@557.09,564.96 JX1.2@557.09,687.01 ; v1@562.99,568.9 JX1.2@562.99,696.85
IO-SWO: JX1.6 U6.39 | length 1293
  Top w5.91: v1@988.29,651.57 U6.39@1051.75,715.03
  Top w9.84: v1@984.25,653.54 990.16,653.54 1037.4,700.79
  Bottom w5.91: JX1.6@560.24,797.24 JX1.6@560,797 623.77,797 645.67,818.9 915.35,818.9 938.98,795.28 938.98,673.23 960.63,651.57 v1(988.19,651.57)
  Bottom w11.81: JX1.6@604.33,801.18 620.08,801.18 ; JX1.6@606.3,791.34 616.14,791.34 643.7,818.9 917.32,818.9 938.98,797.24 938.98,673.23 958.66,653.54 v1@990.16,653.54
IO-USART1_RX: J3.P$3 JX2.2 U6.31 | length 1902.1
  Top w5.91: v1(986.22,543.92) U6.31@1010.51,519.64
  Top w9.84: v1@986.22,545.28 986.22,543.31 U6.31@1000,529.53
  MidLayer1 w5.91: v1(848.43,108.27) 897.64,108.27 986.22,196.85 v1(986.22,543.92) 986.22,610.24 941.93,654.53 941.93,870.08 951.77,879.92 951.77,1079.72 v1(954.72,1082.68)
  Bottom w5.91: J3.P$3@715.1,1081 v1@953.05,1081 ; JX2.2@800,53 848.43,101.43 v1(848.43,108.27)
  Bottom w11.81: J3.P$3@751.97,1082.68 v1@952.76,1082.68 ; J3.P$3@767.72,1082.68 v1@950.79,1082.68 ; JX2.2@805.12,68.9 848.43,112.2 v1@852.36,112.2
IO-USART1_TX: JX2.1 R51.2 U6.30 | length 1526.6
  Top w5.91: v1@927.17,574.92 927.17,573.75 995.31,505.61 U6.30@996.47,505.61 ; v1(927.17,935.04) 938.5,935.04 R51.2@991.06,987.6
  Top w9.84: v1@927.17,574.8 v1(927.17,572.83) 980.32,519.68 U6.30@982.28,519.68
  Top w11.81: v1@929.13,935.04 940.94,935.04 R51.2@992.13,986.22
  MidLayer1 w5.91: v1@927.17,309.06 927.17,490.16 v1(927.17,572.83) ; v1@927.17,570.87 v1(927.17,572.83) ; v1(927.17,935.04) v1(927.17,572.83)
  Bottom w5.91: JX2.1@894.09,53 894.09,64.96 921.26,92.13 v1(921.26,303.15)
  Bottom w11.81: JX2.1@891.73,64.96 891.73,72.83 919.29,100.39 ; JX2.1@903.54,66.93 919.29,82.68 v1@919.29,303.15
IO-VDD_3V3: C10.1 C15.1 C22.2 C27.1 C47.2 D4.2 J5.1 JX1.1 LED1.A LED3.A LED5.A pad.0@1257.87,1187.01 U3.5 U5.8 U6.1 U6.9 U6.24 U6.36 U6.38 U6.48 | length 11532.7
  Top w5.91: U5.8@607.76,139.29 639.29,139.29 v1(649.61,149.61) 649.61,263.78 691.71,305.89 C47.2@691.71,403.5 692.66,402.56 795.85,402.56 796.79,403.5 ; U6.9@719.41,728.46 U6.9@717.05,728.46 736.85,708.66 870.08,708.66 889.76,728.35 889.76,787.4 836.79,840.38 ; U6.1@828.96,840.38 836.79,840.38 ; C22.2@852.29,366.53 815.31,403.5 796.79,403.5 ; v1(994.09,907.48) 993.5,907.48 967.22,881.2 U6.48@926.4,840.38 836.79,840.38 ; U6.38@1065.89,700.89 C27.1@1129.77,764.77 ; U6.36@1080.8,588.54 U6.36@1080.1,589.24 ; v1@1133.81,708.66 1133.81,642.95 ; v1@1133.81,708.71 C27.1@1133.81,764.77 ; v1(1143.7,708.66) 1143.7,652.83 1133.81,642.95 ; v1(1253.94,1175.2) 1224.72,1175.2 D4.2@1198.07,1201.85 1196.85,1203.07 1196.85,1326.77 1218.31,1348.23 U3.5@1248.74,1348.23 1307.05,1348.23 C10.1@1317.13,1338.15 ; C15.1@1317.13,1421.93 C10.1@1317.13,1338.15 ; C10.1@1318.11,1337.17 C10.1@1317.13,1338.15 ; 796.79,403.5 U6.24@828.89,435.6 833.24,435.6 890.75,493.11 890.75,607.28 887.8,610.24 890.75,613.19 1056.15,613.19 U6.36@1080.1,589.24 ; U6.36@1080.1,589.24 1133.81,642.95
  Top w11.81: U5.8@608.27,139.76 624.02,139.76 v1@647.64,163.39 ; U5.8@620.08,137.8 643.7,137.8 v1@653.54,147.64 ; 635.83,141.73 641.73,147.64 v1@641.73,155.51 ; v1@645.67,151.57 645.67,265.75 687.01,307.09 C47.2@687.01,387.8 ; v1@651.57,151.57 651.57,261.81 694.88,305.12 C47.2@694.88,383.86 ; C47.2@706.69,399.61 820.87,399.61 846.46,374.02 C22.2@846.46,368.11 ; 730.92,713.96 736.22,708.66 870.08,708.66 889.76,728.35 889.76,797.24 854.33,832.68 846.46,832.68 ; 803.15,403.54 809.06,403.54 ; 828.74,405.51 828.74,421.26 ; 830.71,403.54 809.06,403.54 ; 834.65,397.64 834.65,433.07 ; 834.65,429.13 809.06,403.54 ; C22.2@840.55,379.92 840.55,442.91 899.61,501.97 v1@899.61,616.14 ; 840.55,395.67 856.3,379.92 C22.2@856.3,368.11 ; 842.52,834.65 919.29,834.65 988.19,903.54 v1@1015.75,903.54 ; 862.2,828.74 903.54,828.74 ; v1@868.11,610.24 v1@889.76,610.24 ; 870.08,816.93 897.64,816.93 ; 870.08,838.58 913.39,838.58 984.25,909.45 v1@1021.65,909.45 ; v1@872.05,616.14 1057.09,616.14 1074.8,598.43 1082.68,598.43 ; 885.83,801.18 885.83,816.93 ; 889.76,785.43 889.76,807.09 U6.48@917.32,834.65 ; U6.38@1076.77,710.63 1131.89,765.75 C27.1@1131.89,767.72 ; 1080.71,596.46 1137.8,653.54 C27.1@1137.8,763.78 ; U6.36@1084.65,588.58 1145.67,649.61 C27.1@1145.67,761.81 ; D4.2@1187.01,1200.79 1187.01,1216.54 1202.76,1232.28 ; D4.2@1198.82,1212.6 1198.82,1330.71 1220.47,1352.36 C10.1@1322.83,1352.36 ; 1200.79,1320.87 1200.79,1322.83 1214.57,1336.61 C10.1@1309.06,1336.61 ; D4.2@1202.76,1200.79 1232.28,1171.26 1281.5,1171.26 1281.5,1194.88 1275.59,1200.79 1236.22,1200.79 1208.66,1228.35 1208.66,1305.12 1236.22,1332.68 1250,1332.68 ; D4.2@1204.72,1214.57 1204.72,1314.96 1216.54,1326.77 C10.1@1312.99,1326.77 ; D4.2@1206.69,1210.63 1206.69,1206.69 1242.13,1171.26 ; D4.2@1206.69,1214.57 1232.28,1188.98 pad.0@1250,1188.98 ; 1210.63,1328.74 1210.63,1330.71 1224.41,1344.49 C10.1@1311.02,1344.49 ; 1212.6,1324.8 1332.68,1324.8 C15.1@1332.68,1411.42 ; U3.5@1244.09,1340.55 1291.34,1387.8 1295.28,1387.8 ; 1273.62,1338.58 C15.1@1273.62,1409.45 ; 1285.43,1342.52 C15.1@1285.43,1405.51 ; 1297.24,1350.39 C15.1@1297.24,1405.51 ; C10.1@1305.12,1346.46 C15.1@1305.12,1411.42 ; C10.1@1314.96,1352.36 C15.1@1314.96,1409.45 ; C10.1@1318.9,1346.46 C15.1@1318.9,1407.48 ; C10.1@1326.77,1352.36 C15.1@1326.77,1409.45
  MidLayer2 w5.91: v1@362.2,122.05 365.16,119.09 534.45,119.09 v1(537.4,122.05) ; v1@368.11,598.43 415.35,598.43 423.23,606.3 850.39,606.3 856.3,612.2 v1@887.8,612.2
  MidLayer2 w11.81: v1@362.2,118.11 366.14,114.17 529.53,114.17 v1(537.4,122.05) v1@541.34,122.05 ; v1@368.11,596.46 415.35,596.46 423.23,604.33 850.39,604.33 860.24,614.17 v1@897.64,614.17
  Bottom w5.91: LED1.A@328,123 v1(361.25,123) ; v1(362.2,598.43) 362.2,681.1 378.1,697 JX1.1@400,697 ; LED3.A@488,123 LED5.A@648,123 v1@648,148 ; v1(994.09,907.48) J5.1@1036,865.57 ; J5.1@1036,854.21 1155.39,854.21 ; v1@1139.76,702.76 1155.39,718.39 1155.39,854.21 ; v1(1253.94,1175.2) 1250.98,1172.24 1250.98,1127.95 1211.61,1088.58 1211.61,918.3 1155.39,862.09 1155.39,854.21
  Bottom w11.81: LED1.A@338.58,125.98 v1@360.24,125.98 ; LED1.A@344.49,120.08 v1@356.3,120.08 ; v1@360.24,598.43 JX1.1@360.24,694.88 ; v1@366.14,598.43 JX1.1@366.14,694.88 ; LED3.A@500,124.02 LED5.A@641.73,124.02 ; LED5.A@647.64,125.98 v1@647.64,171.26 ; LED5.A@651.57,125.98 v1@651.57,173.23 ; v1@990.16,905.51 990.16,850.39 994.09,846.46 J5.1@1007.87,846.46 ; v1@996.06,911.42 v1@1019.68,911.42 ; 998.03,854.33 v1@998.03,901.57 ; J5.1@1007.87,866.14 v1@1007.87,907.48 ; J5.1@1011.81,860.24 v1@1011.81,903.54 ; J5.1@1021.65,864.17 v1@1021.65,909.45 ; J5.1@1057.09,860.24 1151.57,860.24 1214.57,923.23 ; J5.1@1068.9,846.46 1124.02,846.46 1141.73,828.74 v1@1141.73,708.66 ; 1127.95,854.33 1131.89,854.33 1151.57,834.65 v1@1151.57,716.54 ; v1@1147.64,704.72 1159.45,716.54 1159.45,860.24 1214.57,915.35 1214.57,1088.58 1251.97,1125.98 v1@1251.97,1173.23 ; 1147.64,838.58 1147.64,852.36 ; 1149.61,842.52 1151.57,842.52 1224.41,915.35 1224.41,1088.58 1259.84,1124.02 v1@1259.84,1175.2 ; v1@1253.94,1173.23 v1@1271.65,1173.23 ; v1@1255.91,1181.1 v1@1273.62,1181.1 ; 1257.87,1149.61 1279.53,1171.26 v1@1279.53,1173.23 ; 1261.81,1157.48 v1@1261.81,1167.32
  other v1: 649.61,173.23 870.08,614.17 895.67,614.17 1143.7,732.28 1017.72,907.48 1277.56,1175.2
IO-VDD_5V5: 
MAG_DRDY: U4.36 U8.9 | length 953.7
  Top w5.91: U4.36@1923.81,575.45 1923.81,573.87 1986.22,511.46 1986.22,507.87 2015.75,478.35 2027.56,478.35 2061.02,511.81 2076.77,511.81 2112.2,476.38 v1(2112.2,452.76) ; v1(2340.55,454.72) v1(2340.55,454.72) U8.9@2407.93,387.4
  Top w9.84: U4.36@1942.91,557.09 1980.32,519.68 1980.32,511.81 2013.78,478.35 2025.59,478.35 2058.7,511.46 2079.09,511.46 2112.2,478.35 v1@2112.2,458.66 ; v1@2340.55,456.69 v1(2340.55,454.72) U8.9@2403.54,391.73
  MidLayer2 w5.91: v1(2112.2,452.76) 2115.16,455.71 2339.57,455.71 v1(2340.55,454.72)
MPU_DRDY: U4.62 U10.12 | length 914.7
  Top w5.91: U4.62@1965.59,1034.82 1991.8,1061.02 2007.87,1061.02 v1(2023.62,1045.28) ; v1(2385.83,791.34) 2409.53,815.04 U10.12@2469.27,815.04
  Top w9.84: U4.62@1986.22,1055.12 1992.13,1061.02 2009.84,1061.02 2023.19,1047.67 v1@2023.19,1045.7 ; v1@2387.8,795.28 2407.48,814.96 U10.12@2458.66,814.96
  MidLayer1 w5.91: v1(2023.62,791.34) 2023.62,789.37 v1(2023.62,1045.28)
  MidLayer2 w5.91: v1(2023.62,791.34) v1(2385.83,791.34)
N$1: C40.1 U4.13 X101.1 | length 425.4
  Top w5.91: C40.1@1472.47,428.47 1472.47,435.01 1416.99,490.49 1416.99,514.05 U4.13@1506.22,603.29
  Top w9.84: X101.1@1419.29,500 1419.29,517.72 U4.13@1488.19,586.61
  Top w11.81: X101.1@1419.29,486.22 1419.29,480.32 C40.1@1468.5,431.1
N$2: C39.1 U4.12 X101.3 | length 607
  Top w5.91: C39.1@1253.91,555.78 1311.65,498.03 1372.68,498.03 U4.12@1492.08,617.43
  Top w9.84: X101.3@1299.21,496.06 1366.14,496.06 ; 1354.33,496.06 1366.14,496.06 ; U4.12@1474.41,600.39 1419.29,545.28 1415.35,545.28 1366.14,496.06
  Top w11.81: C39.1@1255.91,559.06 1255.91,555.12 X101.3@1299.21,511.81
N$3: 
N$4: 
N$5: 
N$6: 
N$7: LED2.C R8.1 | length 406.8
  Top w5.91: v1(442.91,1553.15) 443.07,1553.31 R8.1@481.38,1553.31
  Top w11.81: v1@442.91,1551.18 R8.1@466.54,1551.18 ; v1@446.85,1557.09 R8.1@468.5,1557.09
  Bottom w5.91: LED2.C@328,1542.53 427.16,1542.53 432.29,1542.53 v1(442.91,1553.15)
  Bottom w11.81: LED2.C@340.55,1543.31 435.04,1543.31 v1@446.85,1555.12 ; 346.46,1549.21 v1@438.98,1549.21
N$8: C2.2 U4.73 | length 170.1
  Top w5.91: U4.73@1812.37,1188.04 C2.2@1881.16,1256.83
  Top w9.84: U4.73@1832.68,1208.34 1880.24,1255.91 C2.2@1885.83,1255.91
N$9: LED5.C R11.1 | length 831.2
  Top w5.91: v1(1301.18,82.68) 1301.18,77.28 R11.1@1325.04,53.43
  Top w11.81: v1@1299.21,84.65 1301.18,84.65 R11.1@1326.77,59.06
  MidLayer2 w5.91: v1@651.57,41.34 887.8,41.34 917.32,70.87 1025.59,70.87 1179.13,70.87 1211.61,103.35 1280.51,103.35 v1(1301.18,82.68)
  Bottom w5.91: LED5.C@648,63.47 648,40.98 v1(649.61,39.37)
  Bottom w11.81: v1@643.7,41.34 LED5.C@643.7,59.06 ; v1(649.61,39.37) LED5.C@649.61,53.15 ; v1@653.54,43.31 LED5.C@653.54,57.09
N$10: 
N$11: 
N$12: C16.2 U4.49 | length 233.4
  Top w5.91: U4.49@2105.09,756.73 2181.29,680.53 C16.2@2206.2,680.53
  Top w11.81: 2127.95,734.25 2181.1,681.1 C16.2@2206.69,681.1
N$13: 
N$14: J7.4 R78.7 | length 206.2
  Top w5.91: v1(1287.4,251.97) 1302.16,237.21 R78.7@1323.16,237.21
  Top w11.81: v1@1285.43,251.97 1303.15,234.25 R78.7@1320.87,234.25 ; 1299.21,238.19 R78.7@1318.9,238.19
  Bottom w5.91: v1(1287.4,251.97) J7.4@1340,252
  Bottom w11.81: v1@1287.4,255.91 J7.4@1307.09,255.91 ; v1@1289.37,248.03 J7.4@1318.9,248.03
N$15: R47.2 U6.12 | length 834.2
  Top w5.91: U6.12@675.33,686.74 690.82,671.26 714.57,671.26 734.25,690.94 897.64,690.94 v1@893.7,687.01 ; v1(897.64,937.01) 931.69,971.06 R47.2@931.69,987.13
  Top w9.84: 690.94,671.26 712.6,671.26 732.28,690.94 v1@893.7,690.94
  Top w11.81: v1@899.61,937.01 899.61,942.91 R47.2@937.01,980.32
  MidLayer1 w5.91: v1(893.7,685.04) 897.64,685.04 v1(897.64,937.01)
  Bottom w5.91: v1@897.64,935.04 v1(897.64,937.01)
N$16: R46.2 U6.13 | length 912.6
  Top w5.91: U6.13@675.26,589.24 675.26,608.33 736.22,669.29 824.8,669.29 ; 755.31,669.29 824.8,669.29 ; v1(866.14,669.29) 824.8,669.29 ; v1@867.38,936.28 R46.2@867.38,987.62
  Top w9.84: U6.13@677.17,596.46 677.17,612.2 681.1,616.14 ; U6.13@681.1,600.39 681.1,616.14 ; v1@858.27,671.26 736.22,671.26 681.1,616.14
  Top w11.81: v1@866.14,937.01 R46.2@866.14,980.32
  MidLayer1 w5.91: v1@864.17,665.35 864.17,701.08 873.03,709.94 873.03,928.15 v1(866.14,935.04)
N$17: 
N$18: C42.2 U6.6 X801.1 | length 279.6
  Top w5.91: C42.2@594.41,762.58 643.27,811.43 X801.1@650.25,811.43 658.53,803.15 726.99,803.15 U6.6@759.37,770.78
  Top w11.81: C42.2@596.46,764.62 650.73,818.9 X801.1@651.57,818.9
N$19: J7.5 R78.8 | length 157.9
  Top w5.91: v1(1289.37,204.72) 1290.36,205.72 R78.8@1323.16,205.72
  Top w11.81: v1@1293.31,210.63 1307.09,210.63 ; v1@1295.28,202.76 R78.8@1311.02,202.76
  Bottom w5.91: v1@1291.09,203 J7.5@1340,203
  Bottom w11.81: v1@1291.34,200.79 J7.5@1316.93,200.79 ; v1@1291.34,208.66 J7.5@1311.02,208.66
N$20: 
N$21: 
N$22: C41.1 U6.5 X801.3 | length 355.2
  Top w5.91: C41.1@719.16,972.47 667.56,920.87 X801.3@664.28,920.87 666.36,918.79 666.36,857.26 704.72,818.9 739.09,818.9 U6.5@773.29,784.7
  Top w11.81: X801.3@665.35,923.23 714.57,972.44 C41.1@722.44,972.44
N$23: R51.1 U4.69 | length 1119.4
  Top w5.91: R51.1@991.06,1050.59 1007.28,1050.59 v1(1025.59,1068.9) ; v1(1728.34,1049.21) 1730.31,1049.21 1751.97,1070.87 1805.51,1070.87 U4.69@1867.53,1132.88
  Top w9.84: v1@1730.32,1051.18 1750,1070.87 1807.09,1070.87 U4.69@1850.39,1114.17
  Top w11.81: R51.1@988.19,1051.18 1001.97,1051.18 v1@1023.62,1072.83
  MidLayer2 w5.91: v1(1025.59,1068.9) 1498.03,1068.9 1517.72,1049.21 1641.73,1049.21 1698.82,1049.21 v1(1728.34,1049.21)
  Bottom w5.91: v1(1025.59,1068.9) v1@1027.56,1068.9
N$24: 
N$25: 
N$26: LED4.C R10.2 | length 141.9
  Top w5.91: v1(523.62,1545.28) 546.97,1545.28 R10.2@554.72,1553.03
  Top w11.81: v1@531.5,1549.21 R10.2@553.15,1549.21
  Bottom w5.91: LED4.C@488,1542.53 520.87,1542.53 v1(523.62,1545.28)
  Bottom w11.81: LED4.C@494.09,1537.4 v1@519.68,1537.4 ; LED4.C@498.03,1545.28 v1@521.65,1545.28
N$27: 
N$28: 
N$29: LED1.C R1.1 | length 1034.1
  Top w5.91: v1(1159.45,108.27) 1180.12,108.27 R1.1@1187.72,115.87
  Top w11.81: v1@1163.39,114.17 R1.1@1188.98,114.17
  MidLayer1 w5.91: v1@350.02,19.68 v1(353.05,22.72)
  MidLayer2 w5.91: v1@351.98,21.65 v1(353.05,22.72) 402.18,71.85 892.72,71.85 905.51,84.65 1135.83,84.65 v1(1159.45,108.27)
  Bottom w5.91: LED1.C@328,63.47 353.05,38.43 v1(353.05,22.72)
  Bottom w11.81: LED1.C@326.77,64.96 328.74,64.96 356.3,37.4 v1@356.3,23.62 ; v1@350.39,21.65 350.39,45.28
N$30: 
N$31: J1.10 R41.2 | length 173
  Top w5.91: J1.10@249.35,351.35 R41.2@327.83,351.35
  Top w11.81: J1.10@271.65,356.3 R41.2@316.93,356.3 ; J1.10@273.62,344.49 R41.2@322.83,344.49
N$32: 
N$33: J12.2 R45.1 | length 1309.4
  Top w5.91: R45.1@1759.96,253.82 v1(1789.49,253.82)
  Top w11.81: R45.1@1769.68,259.84 v1@1787.4,259.84 ; R45.1@1773.62,251.97 v1@1793.31,251.97
  Bottom w5.91: v1(1789.49,253.82) 1773.62,237.95 1773.62,190.94 1860.24,104.33 2045.28,104.33 2194.55,253.61 J12.2@2236,253.61
  Bottom w11.81: v1@1783.46,255.91 1773.62,246.06 1773.62,188.98 1856.3,106.3 2047.24,106.3 2198.82,257.87 J12.2@2218.5,257.87
N$34: 
N$35: 
N$36: 
N$37: J12.3 R44.1 | length 1081.5
  Top w5.91: R44.1@1757.99,133.74 v1(1795.16,133.74)
  Top w11.81: R44.1@1765.75,137.8 v1@1785.43,137.8 ; R44.1@1767.72,133.86 v1@1793.31,133.86
  Bottom w5.91: v1(1795.16,133.74) 1840.31,88.58 2064.96,88.58 2180.38,204 J12.3@2236,204
  Bottom w11.81: v1@1791.34,133.86 1840.55,84.65 2068.9,84.65 2185.04,200.79 J12.3@2214.57,200.79